# EAGLE board Nusbio1.0.WaveShare.I2C.LCD (EAGLE 9.6.2)

Size 94.03 x 98 mm. Coordinates in mm from the lower left corner, seen from the top.
Outline: 4,0 2,1 0,4
Outline: 91,0 94,4
Outline: 94,95 91,98
Outline: 3,98 0,95
Outline: 0,95 arc-90 3,98
Outline: 3,98 91,98
Outline: 91,98 arc-90 94,95
Outline: 94,95 94,4
Outline: 94,4 arc-90 91,0
Outline: 91,0 4,0
Outline: 4,0 arc-90 0,4
Outline: 0,4 0,95
Copper layers (1*16): Top 0.035mm / dielectric 1.5mm / Bottom 0.035mm
Design rules "default": minimum track width 10mil, minimum drill 24mil, track to track 8mil, track to pad 8mil, pad to pad 8mil, via to via 8mil, smd to smd 8mil, copper to edge 40mil, drill to drill 8mil, minimum pad ring 10mil, minimum via ring 8mil, stop-mask expansion 4mil, vias tented up to drill 0mil, thermal gap 10mil

## Footprints (pad centres in the part's own frame; a part is rotated, then mirrored left to right if it is on the bottom)
B3F-10XX = drill 1.016 long: 1 -3.251,2.261; 2 3.251,2.261; 3 -3.251,-2.261; 4 3.251,-2.261
1X05 = drill 1.016 long: 1 -5.08,0; 2 -2.54,0; 3 0,0; 4 2.54,0; 5 5.08,0
1X06 = drill 1.016 octagon: 1 -6.35,0; 2 -3.81,0; 3 -1.27,0; 4 1.27,0; 5 3.81,0; 6 6.35,0
3,3-PAD = drill 3.3 pad 5.842: B3,3 0,0
1X04 = drill 1.016 long: 1 -3.81,0; 2 -1.27,0; 3 1.27,0; 4 3.81,0
1206 = smd 1.6 x 1.803: A -1.422,0; C 1.422,0
SIP10 = drill 0.6 long: 1 -11.46,0; 2 -8.92,0; 3 -6.38,0; 4 -3.84,0; 5 -1.3,0; 6 1.24,0; 7 3.78,0; 8 6.32,0; 9 8.86,0; 10 11.4,0
1X10-BIG = drill 1.016 pad 1.778 octagon: 1 -11.43,0; 2 -8.89,0; 3 -6.35,0; 4 -3.81,0; 5 -1.27,0; 6 1.27,0; 7 3.81,0; 8 6.35,0; 9 8.89,0; 10 11.43,0

## Placement (x,y rotation side)
BUTTON_1_GPIO_0  [B3F-10XX]  71,19 90 top
CBUS_PINS  [1X05]  55,8 90 top
F_HEADER  [1X06]  47,38 180 top
H1  MOUNT-PAD-ROUND3.3  [3,3-PAD]  7,7 0 top
H2  MOUNT-PAD-ROUND3.3  [3,3-PAD]  87,7 0 top
H3  MOUNT-PAD-ROUND3.3  [3,3-PAD]  7,90 0 top
H4  MOUNT-PAD-ROUND3.3  [3,3-PAD]  87,90 0 top
H5  MOUNT-PAD-ROUND3.3  [3,3-PAD]  23,35 0 top
H6  MOUNT-PAD-ROUND3.3  [3,3-PAD]  23,90 0 top
IC2_TO_LCD  [1X04]  19,81 90 top
L_HEADER  [1X05]  39,8 90 top
LED_1_GPIO_1  [1206]  22,9 270 top
LPOWER  [1206]  3,47 270 top
RN1  [SIP10]  3,67 270 top
U$1  PINHD-1X10  [1X10-BIG]  3,28 270 top

## Library data of the parts
BUTTON_1_GPIO_0 = switch-omron; MPN: B3F-1000; OC_FARNELL: 176432; OC_NEWARK: 36M3542
CBUS_PINS IC2_TO_LCD L_HEADER = pinhead
F_HEADER LED_1_GPIO_1 LPOWER U$1 = adafruit
H1-H6 = holes
RN1 = resistor-sip

## Nets
BUTTON_1_R: BUTTON_1_GPIO_0.4 RN1.8
CTS_G4: F_HEADER.6 U$1.5
DCD_G3: L_HEADER.2 U$1.4
DO_NOT_USE: RN1.10
DSR_G1: L_HEADER.3 LED_1_GPIO_1.A
DTR_G2: L_HEADER.5 U$1.3
GND: F_HEADER.2 IC2_TO_LCD.4 RN1.1 U$1.10
LED_1_R: LED_1_GPIO_1.C RN1.5
LED_PWR_R: LPOWER.C RN1.9
NUSBIO_VCC: F_HEADER.1 IC2_TO_LCD.3 LPOWER.A U$1.9
RESET: L_HEADER.1
RI_G0: BUTTON_1_GPIO_0.1 L_HEADER.4
RTS_G7: F_HEADER.5 IC2_TO_LCD.2 U$1.8
RX_G6: F_HEADER.4 IC2_TO_LCD.1 U$1.7
TX_G5: F_HEADER.3 U$1.6

## Tracks (layer width: path | path; a pad name or v marks a point on that pad's centre or on a via)
BUTTON_1_R  (1 unrouted)
CTS_G4  (1 unrouted)
DCD_G3  (1 unrouted)
DSR_G1  (1 unrouted)
DTR_G2  (1 unrouted)
GND  (3 unrouted)
LED_1_R  (1 unrouted)
LED_PWR_R  (1 unrouted)
NUSBIO_VCC  (3 unrouted)
RI_G0  (1 unrouted)
RTS_G7  (2 unrouted)
RX_G6  (2 unrouted)
TX_G5  (1 unrouted)

## Text on the board
tNames: GND | VCC | I2C_SDA_GPIO_7 | GND | I2C_SCL_GPIO_6 | NOT USED | + | Nusbio | /LCD v1.0 2025/7 | www.FredericTorres.com | 0 N/A | 1 N/A | 2 | 3 | 4 | 5 | 6 | 7 | BUTTON 1 | VCC | GND | +
bNames: Nusbio v1.0 /LCD | v1.0 /LCD 2025/7 | www.FredericTorres.com